# Altium PCB ICwT.PcbDoc (part 2 of 4)
Units mm, origin at the board's own origin, x right, y up, seen from the top; angles counter-clockwise.
Board outline 132 x 99.5 mm, 2 copper layers (Top Layer, Bottom Layer); 241 components, 265 nets, 1108 pads, 443 vias.
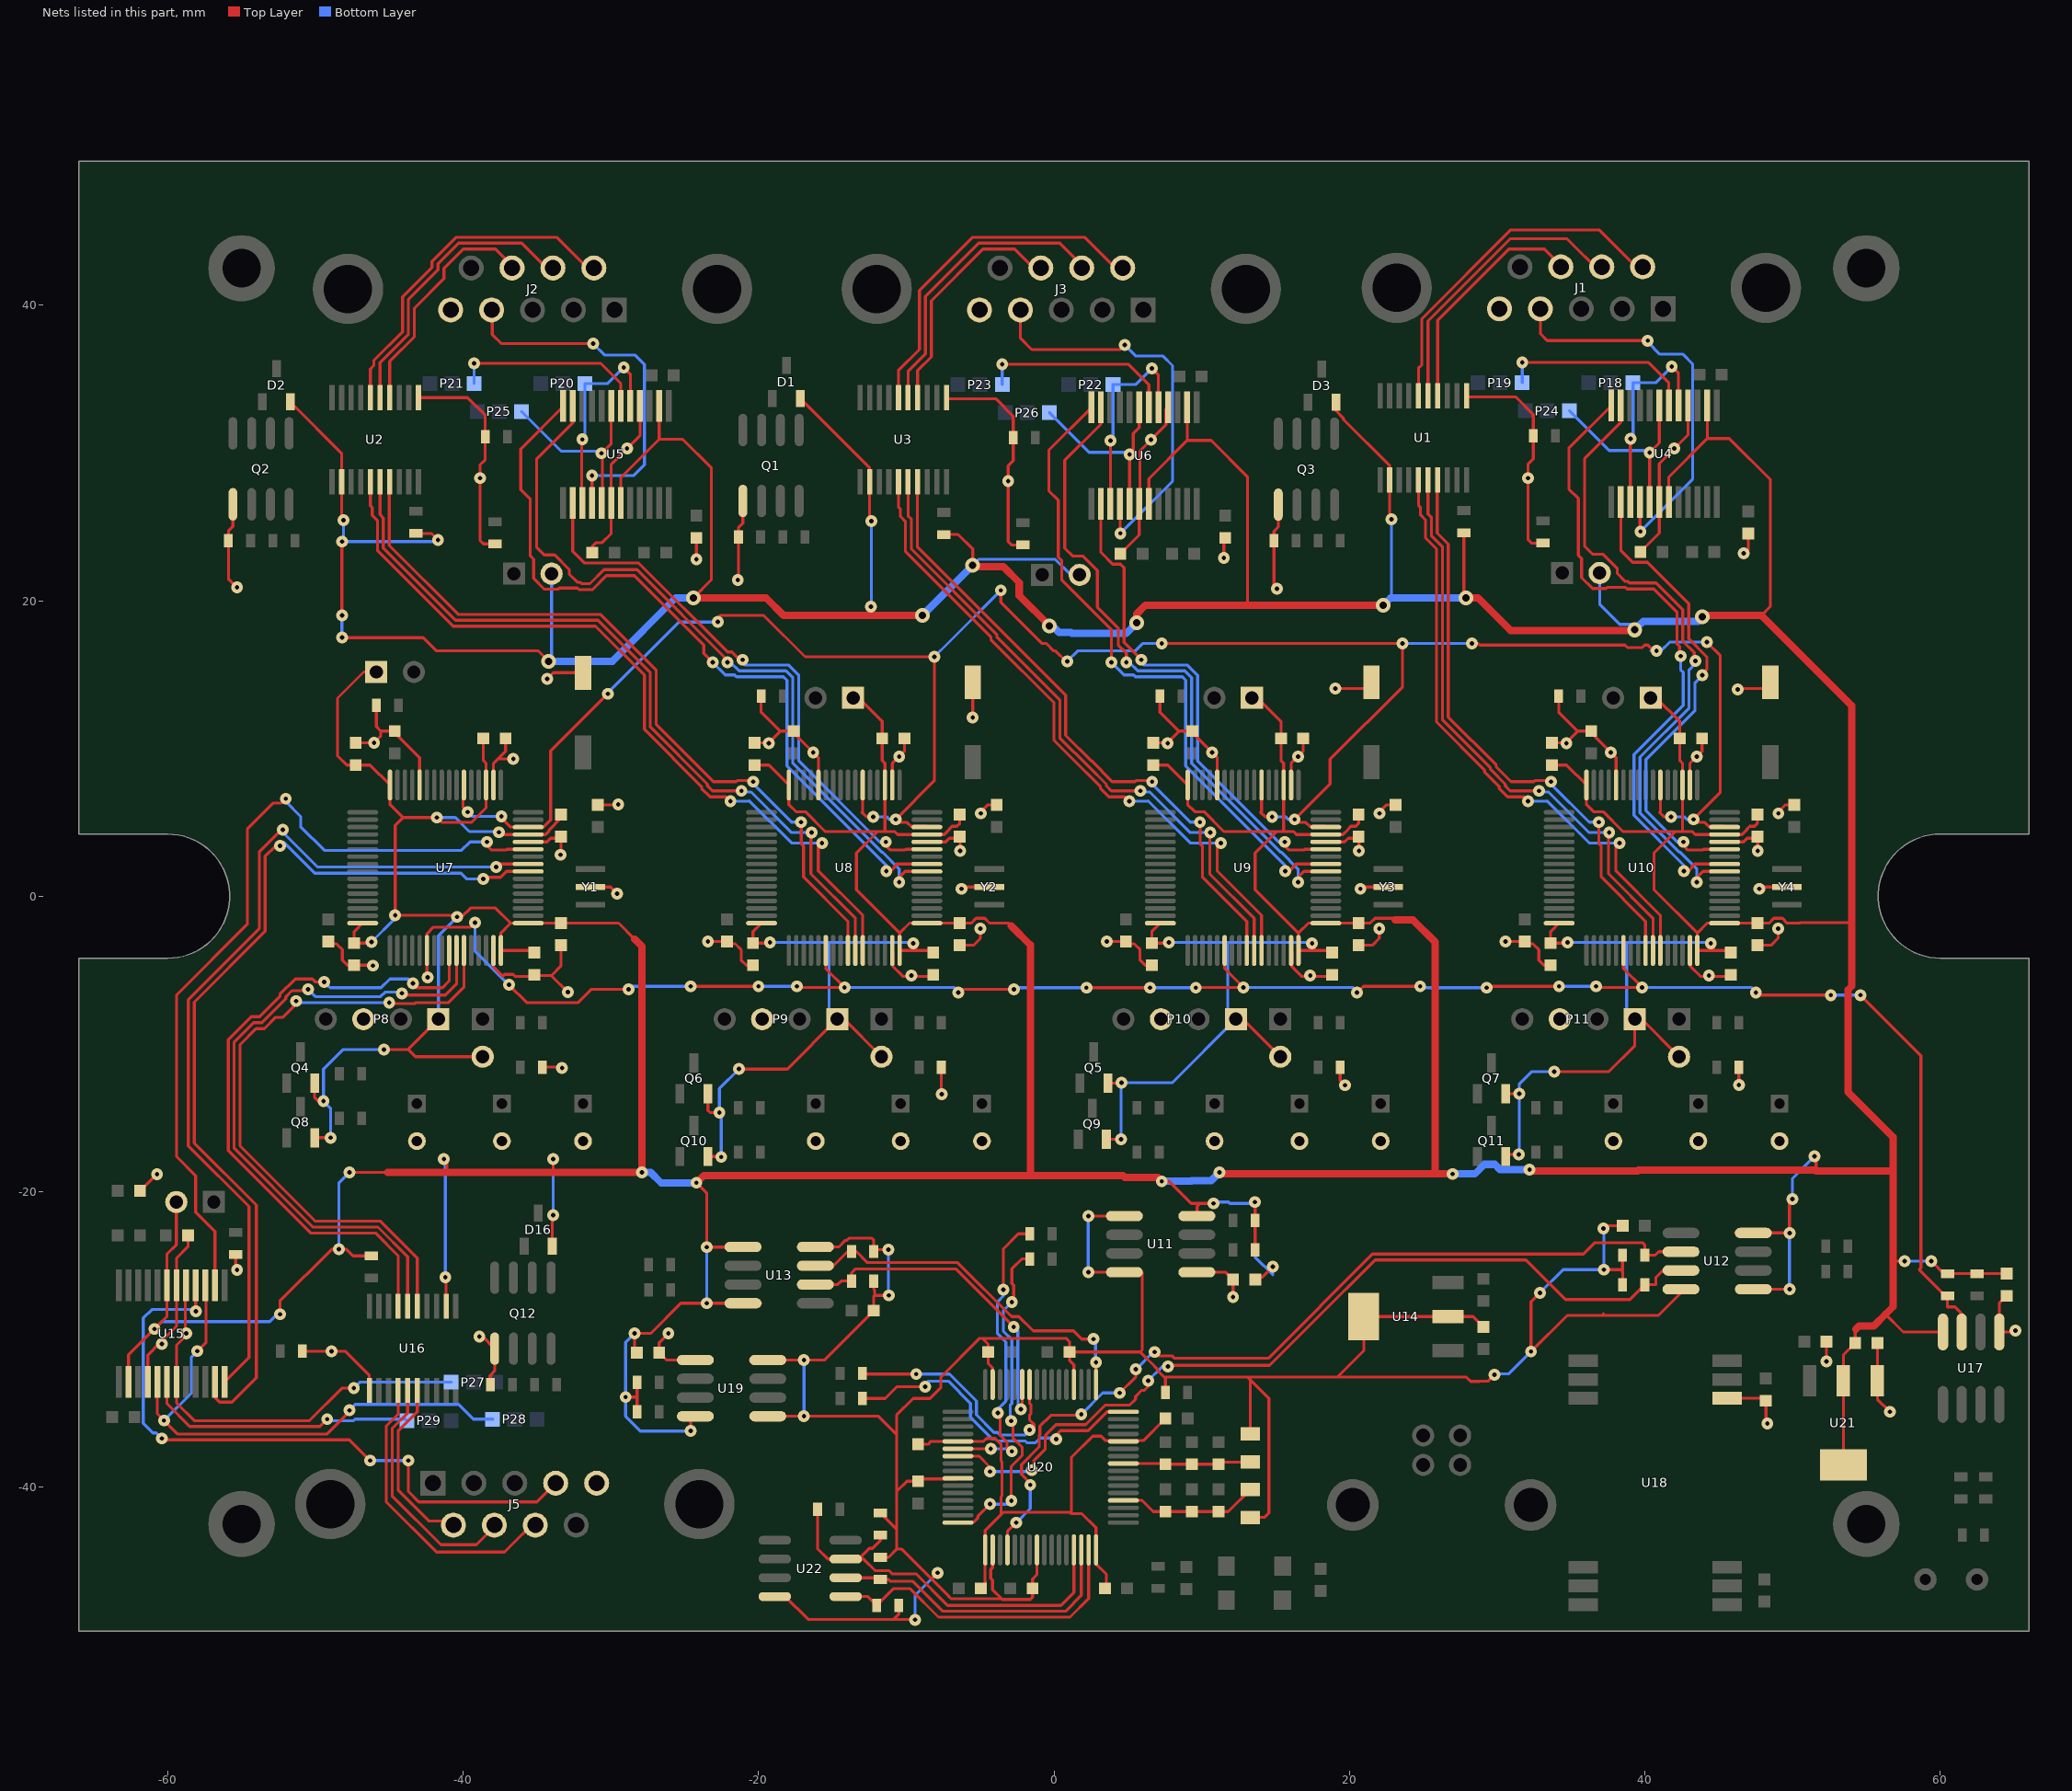
[diagram p2: the nets of this part, all layers, seen from the top]

## Via types
v1: diameter 0.8, hole 0.3, Top Layer to Bottom Layer, 433 vias
v2: diameter 1, hole 0.5, Top Layer to Bottom Layer, 10 vias

## Nets (pads, with @x,y where several pads share a name; then routed paths per layer and width w, separated by ;. In a path a pad name is that pad's centre, name@x,y a point inside that pad or via, vN(x,y) a via of type N, cw(c..) or ccw(c..) an arc to the next point about the centre after c; other vN are vias at no path point)
3.3VDC_External_iface1: C17.2 C18.2 C19.2 C20.2 C21.2 C22.2 C23.2 C24.2 C29.2 C30.2 C31.2 C32.2 C37.2 C38.2 C39.2 C40.2 C41.2 C42.2 C43.2 C44.2 C45.2 C46.2 C47.2 C48.2 C53.2 C54.2 C59.2 C62.2 D1.2 D2.2 D3.2 D16.2 P1.2 P2.2 P3.2 P4.1 P5.1 P6.1 P7.1 P8.1 P9.1 P10.1 P11.1 P12.2 P13.2 P14.2 P15.2 P16.2 Q4.2 Q5.2 Q6.2 Q7.2 Q8.2 Q9.2 Q10.2 Q11.2 R4.2 R5.2 R6.2 R36.2 R40.2 R43.2 R47.2 R48.2 R54.2 R59.2 U1.2 U2.2 U3.2 U4.2 U4.19 U5.2 U5.19 U6.2 U6.19 U7.1 U7.13 U7.19 U7.32 U7.48 U7.64 U8.1 U8.13 U8.19 U8.32 U8.48 U8.64 U9.1 U9.13 U9.19 U9.32 U9.48 U9.64 U10.1 U10.13 U10.19 U10.32 U10.48 U10.64 U11.8 U12.1 U12.4 U13.1 U13.4 U15.2 U15.19 U16.2 U17.8 U19.8 U21.2 U21.4 | length 977.7
  Top Layer w0.2: U15.2@-62.65,-32.875 -62.65,-31.05 v1(-60.9,-29.3) -60.05,-28.45 U15.19@-60.05,-26.325 -60.05,-24.225 -59.415,-23.59 P16.2@-59.415,-20.7 ; v1(-52.4,-28.3) -52.4,-27.4 -48.9,-23.9 -47.9,-23.9 -47.45,-24.35 R43.2@-46.2,-24.35 ; D2.2@-51.685,33.45 -48.225,29.99 U2.2@-48.225,28.05 -48.225,25.578 v1(-48.1,25.453) ; Q8.2@-50.05,-16.35 v1(-48.975,-16.35) ; Q4.2@-50.05,-12.65 -50.05,-13.625 -49.8,-13.875 v1(-49.45,-13.875) ; v1(-48.2,17.5) -42.7,17.5 -41.8,16.6 -34.9,16.6 v2(-34.2,15.9) ; v1(-48.2,19) v1(-48.2,24) ; v1(-47.7,-18.7) -45.1,-18.7 ; U7.48@-46.795,-1.825 -47.375,-2.405 C41.2@-47.375,-3.175 -46.275,-3.175 v1(-46.2,-3.1) ; P4.1@-45.875,15.175 -46.725,15.175 -48.5,13.4 -48.5,9.5 -47.875,8.875 C21.2@-47.275,8.875 -46.295,8.875 U7.32@-44.945,7.525 -44.945,6.195 -44.075,5.325 ; v1(-45.35,-10.375) -43.725,-10.375 ; R5.2@-43.2,24.55 -42.15,24.55 v1(-41.7,24.1) ; P8.1@-41.675,-8.325 -43.725,-10.375 ; v1(-41.3,-17.8) -41.1,-18 -41.1,-18.7 ; v1(-41.2,-25.8) -41.15,-25.85 U16.2@-41.15,-27.75 ; P12.2@-38.675,-10.865 -43.235,-10.865 -43.725,-10.375 ; C17.2@-38.625,10.675 -38.625,9.175 -38.445,8.995 U7.19@-38.445,7.525 -38.445,5.965 -39.41,5 -41.45,5 v1(-41.775,5.325) -44.075,5.325 ; v1(-37.575,4.325) -37.625,4.275 -37.625,4.175 -34.425,4.175 -34.175,4.425 -34.175,4.493 -33.375,5.293 C30.2@-33.375,5.525 ; -36.777,-1.823 -37.8,-0.8 -39.5,-0.8 -40.1,-1.4 v1(-40.4,-1.4) -40.3,-1.3 v1(-44.6,-1.3) -44.6,4.8 -44.075,5.325 ; C46.2@-35.175,-3.825 -35.325,-3.675 U7.64@-37.445,-3.675 -37.445,-2.493 -36.777,-1.825 U7.1@-35.595,-1.825 -29.475,-1.825 -28.4,-2.9 ; D16.2@-33.96,-23.7 -33.96,-21.66 v1(-33.9,-21.6) ; -33.9,-18.7 v1(-33.9,-17.8) ; U5.19@-29.325,26.625 -29.325,28.327 -26.725,30.927 ; v1(-29,-33.9) -28.225,-33.9 ; R59.2@-28.225,-34.9 -28.225,-33.9 ; R54.2@-28.225,-32.9 -28.225,-33.9 ; C62.2@-28.225,-30.9 -28.4,-30.725 v1(-28.4,-29.6) -27.3,-29.6 -25.25,-27.55 v1(-23.5,-27.55) -23.495,-27.555 U13.4@-19.846,-27.555 ; U5.2@-26.725,33.175 -26.725,30.927 ; v1(-24.6,-36.2) -24.6,-35.53 U19.8@-24.275,-35.205 ; v2(-24.4,20.2) -23.2,21.4 -23.2,29 -25.127,30.927 -26.725,30.927 ; v1(-24.2,-19.4) -23.5,-20.1 v1(-23.5,-23.75) -21.055,-23.75 U13.1@-21.05,-23.745 ; Q10.2@-23.425,-17.625 -22.55,-17.625 v1(-22.525,-17.65) ; Q6.2@-23.425,-13.375 -23.425,-14.5 -23.275,-14.65 v1(-22.65,-14.65) ; v1(-21.325,-11.7) -18.05,-11.7 P9.1@-14.675,-8.325 -14.215,-8.325 P13.2@-11.675,-10.865 ; C22.2@-20.275,8.875 -19.295,8.875 U8.32@-17.945,7.525 -17.945,6.195 -17.464,5.714 -16.824,5.714 -15.485,4.375 -11.925,4.375 ; U8.48@-19.795,-1.825 -20.375,-2.405 C42.2@-20.375,-3.175 -19.275,-3.175 v1(-19.225,-3.125) ; D1.2@-17.16,33.675 -12.475,28.99 U3.2@-12.475,28.05 -12.475,25.503 v1(-12.35,25.378) ; P5.1@-13.6,13.425 -13.225,13.425 -11.625,11.825 C18.2@-11.625,10.675 -11.625,9.175 -11.445,8.995 U8.19@-11.445,7.525 -11.445,4.47 -11.35,4.375 ; -12.4,19 v1(-12.4,19.6) ; v1(-9.525,-3.2) -9.375,-3.35 -9.375,-3.675 ; C47.2@-8.175,-3.825 -8.325,-3.675 -9.375,-3.675 ; R6.2@-7.45,24.475 -6.475,24.475 -5.5,23.5 v2(-5.5,22.4) ; C31.2@-6.375,5.525 -6.375,4.925 -6.575,4.725 -6.899,4.725 -7.075,4.549 -7.075,4.525 -7.425,4.175 U8.13@-8.595,4.175 -10.575,4.175 -10.775,4.375 -11.35,4.375 ; -2.9,-2 -3.075,-1.825 -4.36,-1.825 -4.685,-1.5 -5.265,-1.5 -5.59,-1.825 U8.1@-8.595,-1.825 -9.777,-1.825 -10.445,-2.493 ; Q9.2@3.55,-16.45 v1(4.55,-16.45) ; Q5.2@3.65,-12.65 4.55,-12.65 v1(4.575,-12.625) ; U6.19@6.425,26.55 6.425,28.252 9.025,30.852 ; C23.2@6.725,8.875 7.705,8.875 U9.32@9.055,7.525 9.055,6.195 9.536,5.714 10.176,5.714 11.515,4.375 15.075,4.375 ; U9.48@7.205,-1.825 6.625,-2.405 C43.2@6.625,-3.175 7.725,-3.175 v1(7.775,-3.125) ; v1(7.3,-19.3) 7.8,-19.3 9.3,-20.8 9.9,-20.8 ; U6.2@9.025,33.1 9.025,30.852 ; U11.8@9.675,-21.645 9.7,-21.62 9.7,-21 9.9,-20.8 ; v1(10.8,-20.8) 9.9,-20.8 ; P10.1@12.325,-8.325 12.785,-8.325 P14.2@15.325,-10.865 ; 13.1,19.7 13.1,28.4 10.648,30.852 9.025,30.852 ; P6.1@13.4,13.425 13.775,13.425 15.375,11.825 15.375,9.175 15.555,8.995 U9.19@15.555,7.525 15.555,4.47 15.65,4.375 ; v1@13.6,-20.8 13.625,-20.825 R36.2@13.625,-21.95 R40.2@13.625,-23.95 ; C54.2@13.625,-25.95 13.8,-25.775 14.125,-25.775 v1(14.825,-25.075) ; v1(17.475,-3.2) 17.625,-3.35 17.625,-3.675 ; C45.2@18.825,-3.825 18.675,-3.675 17.625,-3.675 ; D3.2@19.09,33.425 19.09,32.858 19.6,32.349 19.6,32.264 22.729,29.135 22.729,25.628 v1(22.854,25.503) ; C29.2@20.625,5.525 20.625,4.925 20.425,4.725 20.101,4.725 19.925,4.549 19.925,4.525 19.575,4.175 U9.13@18.405,4.175 16.425,4.175 16.225,4.375 15.65,4.375 ; 23.1,-1.6 23,-1.5 21.735,-1.5 21.41,-1.825 U9.1@18.405,-1.825 17.223,-1.825 16.555,-2.493 ; v2@27.754,20.346 R4.2@27.754,24.6 ; Q11.2@30.575,-17.625 30.725,-17.475 v1(31.475,-17.475) ; Q7.2@30.575,-13.375 v1(31.5,-13.375) ; C24.2@33.725,8.875 34.705,8.875 U10.32@36.055,7.525 36.055,6.195 36.536,5.714 37.176,5.714 38.515,4.375 42.075,4.375 ; v1(33.875,-11.875) 37.575,-11.875 39.325,-10.125 P11.1@39.325,-8.325 39.785,-8.325 P15.2@42.325,-10.865 ; U10.48@34.205,-1.825 33.625,-2.405 C44.2@33.625,-3.175 34.725,-3.175 v1(34.775,-3.125) ; P7.1@40.4,13.425 40.775,13.425 42.375,11.825 42.375,9.175 42.555,8.995 U10.19@42.555,7.525 42.555,4.47 42.65,4.375 ; U4.19@41.629,26.675 41.629,28.377 44.229,30.977 ; U4.2@44.229,33.225 44.229,30.977 ; v1(44.475,-3.2) 44.625,-3.35 44.625,-3.675 ; C48.2@45.825,-3.825 45.675,-3.675 44.625,-3.675 ; U12.4@46.146,-22.795 49.795,-22.795 v1(49.8,-22.8) 49.8,-20.7 v1(50,-20.5) ; U12.1@47.35,-26.605 47.355,-26.6 v1(49.8,-26.6) ; C40.2@47.625,-2.075 47.375,-1.825 U10.1@45.405,-1.825 44.223,-1.825 43.555,-2.493 ; C40.2@47.625,-1.825 48.41,-1.825 48.735,-1.5 49.315,-1.5 49.64,-1.825 50.475,-1.825 50.5,-1.8 54,-1.8 ; C32.2@47.625,5.525 47.625,4.925 47.425,4.725 47.101,4.725 46.925,4.549 46.925,4.525 46.575,4.175 U10.13@45.405,4.175 43.425,4.175 43.225,4.375 42.65,4.375 ; 47.9,19 48.5,19.6 48.5,28.2 45.723,30.977 44.229,30.977 ; v1(51.5,-17.6) 51.6,-17.7 51.6,-18.6 ; U21.4@53.45,-38.5 U21.2@53.45,-32.8 53.45,-31.05 C59.2@54.25,-30.25 54.25,-29.35 54.3,-29.3 ; 56.3,-28.3 57.5,-29.5 U17.8@60.19,-29.5 ; 56.8,-24.7 v1(57.6,-24.7) ; v1(59.4,-24.7) 60.25,-25.55 R47.2@60.495,-25.55 C53.2@64.495,-25.55 ; -11.925,4.375 -13.375,2.925 -13.375,0.437 -10.445,-2.493 ; -11.925,4.375 -11.35,4.375 ; -10.445,-2.493 U8.64@-10.445,-3.675 -9.375,-3.675 ; 15.075,4.375 13.625,2.925 13.625,0.437 16.555,-2.493 ; 15.075,4.375 15.65,4.375 ; 16.555,-2.493 U9.64@16.555,-3.675 17.625,-3.675 ; 42.075,4.375 40.625,2.925 40.625,0.437 43.555,-2.493 ; 42.075,4.375 42.65,4.375 ; 43.555,-2.493 U10.64@43.555,-3.675 44.625,-3.675
  Top Layer w0.5: -45.1,-18.7 -41.1,-18.7 -33.9,-18.7 v1(-27.9,-18.7) -27.9,-3.4 -28.4,-2.9 ; v2(-24.4,20.2) -19.5,20.2 -18.3,19 -12.4,19 v2(-8.9,19) ; v1(-24.2,-19.4) -23.7,-18.9 -1.6,-18.9 ; v2(-5.5,22.4) -5.4,22.3 -3.422,22.3 -2.35,21.228 -2.35,20.35 v2(-0.3,18.3) ; -2.9,-2 -1.6,-3.3 -1.6,-18.9 ; v2(5.6,18.5) 5.6,19.1 6.2,19.7 13.1,19.7 v2(22.3,19.7) ; v1(7.3,-19.3) 7.025,-19.025 4.807,-19.025 4.682,-18.9 -1.6,-18.9 ; v1(11.2,-18.7) 11.2,-18.8 25.8,-18.8 ; 23.1,-1.6 24.3,-1.6 25.8,-3.1 25.8,-18.8 ; v1(27,-18.8) 25.8,-18.8 ; v2(27.9,20.2) 28.7,20.2 30.925,17.975 39.275,17.975 v2(39.325,18.025) ; v1(32.2,-18.5) 32.3,-18.6 39.521,-18.6 39.571,-18.55 51.55,-18.55 51.6,-18.6 56.8,-18.6 ; v2(43.9,18.9) 44,19 47.9,19 54,12.9 54,-1.8 54,-6.098 53.75,-6.348 53.75,-13.25 56.8,-16.3 56.8,-18.6 ; 54.3,-29.3 54.5,-29.1 55.5,-29.1 56.3,-28.3 56.8,-27.8 56.8,-24.7 56.8,-18.6
  Bottom Layer w0.2: v1(-60.9,-29.3) -60.4,-28.8 -53.1,-28.8 -52.6,-28.3 v1(-52.4,-28.3) ; v1(-48.975,-16.35) -48.975,-14.35 v1(-49.45,-13.875) -49.45,-11.7 -48.125,-10.375 v1(-45.35,-10.375) ; v1(-48.4,-23.9) -48.4,-19.4 v1(-47.7,-18.7) ; v1(-48.2,17.5) v1(-48.2,19) ; v1(-48.1,25.453) -48.1,24.1 v1(-48.2,24) -41.8,24 v1(-41.7,24.1) ; v1(-46.2,-3.1) -44.6,-1.5 v1(-44.6,-1.3) ; P8.1@-41.675,-8.325 -41.675,-2.675 v1(-40.4,-1.4) v1@-40.2,-1.4 ; v1@-41.575,5.525 v1(-41.775,5.325) -40.525,5.325 -39.575,4.375 -37.625,4.375 v1(-37.575,4.325) ; v1(-41.3,-17.8) -41.2,-17.9 v1(-41.2,-25.8) ; v2(-34.2,15.9) -34.01,16.09 P2.2@-34.01,21.825 ; v1(-33.9,-21.6) v1(-33.9,-17.8) ; v1(-28.4,-29.6) -29,-30.2 v1(-29,-33.9) -29,-35.2 -28,-36.2 v1(-24.6,-36.2) ; v1(-23.5,-27.55) v1(-23.5,-23.75) ; v1(-22.525,-17.65) -22.525,-14.775 v1(-22.65,-14.65) -22.65,-13.025 v1(-21.325,-11.7) ; v1(-19.225,-3.125) -15.225,-3.125 ; P9.1@-14.675,-8.325 -15.225,-7.775 -15.225,-3.125 ; v1(-12.4,19.6) -12.35,19.65 v1(-12.35,25.378) ; v1(-9.525,-3.2) -9.6,-3.125 -15.225,-3.125 ; v2(-5.5,22.4) -5.1,22.8 0.074,22.8 1.124,21.75 P3.2@1.74,21.75 ; v1(4.55,-16.45) 4.55,-12.65 v1(4.575,-12.625) 8.025,-12.625 P10.1@12.325,-8.325 11.775,-7.775 11.775,-3.125 ; v1(7.775,-3.125) 11.775,-3.125 ; v1(10.8,-20.8) 10.9,-20.7 11.81,-20.7 11.91,-20.8 13.5,-20.8 v1(13.6,-20.7) 13.6,-24.4 14.825,-25.625 v1(14.825,-25.075) ; v1(17.475,-3.2) 17.4,-3.125 11.775,-3.125 ; 22.8,20.2 22.854,20.254 v1(22.854,25.503) ; v1(31.475,-17.475) 31.5,-17.45 v1(31.5,-13.375) 31.5,-12.725 32.35,-11.875 v1(33.875,-11.875) ; v1(34.775,-3.125) 38.775,-3.125 ; P1.2@36.944,21.875 36.944,19.756 38.3,18.4 39.7,18.4 ; P11.1@39.325,-8.325 38.775,-7.775 38.775,-3.125 ; v1(44.475,-3.2) 44.4,-3.125 38.775,-3.125 ; v1(49.8,-26.6) v1(49.8,-22.8) ; v1(50,-20.5) 50,-19.1 v1(51.5,-17.6) ; v1(57.6,-24.7) v1(59.4,-24.7)
  Bottom Layer w0.5: v2(-34.2,15.9) -29.9,15.9 -25.6,20.2 v2(-24.4,20.2) ; v1(-27.9,-18.7) -27.3,-18.7 -26.6,-19.4 v1(-24.2,-19.4) ; v2(-8.9,19) v2(-5.5,22.4) ; v2(-0.3,18.3) -0.1,18.3 0.35,17.85 1.152,17.85 1.202,17.8 4.9,17.8 v2(5.6,18.5) ; v1(7.3,-19.3) 9.298,-19.3 9.348,-19.25 10.65,-19.25 v1(11.2,-18.7) ; v2(22.3,19.7) 22.8,20.2 v2(27.9,20.2) ; v1(27,-18.8) 28.498,-18.8 29.148,-18.15 29.852,-18.15 30.202,-18.5 v1(32.2,-18.5) ; 39.7,18.4 39.9,18.6 43.6,18.6 v2(43.9,18.9)
/SHDN_External_iface1: U7.8 U15.11 | length 63.3
  Top Layer w0.2: U15.11@-56.8,-32.875 -56.8,-33.924 -56.474,-34.25 -55.65,-34.25 -54,-32.6 -54,-20.907 -58.2,-16.707 -58.2,-7.179 -53.4,-2.379 -53.4,2.7 -52.7,3.4 v1(-52.4,3.4) v1@-52.3,3.5 ; v1(-38.625,1.175) -38.625,1.275 -37.471,1.275 -37.071,1.675 U7.8@-35.595,1.675
  Bottom Layer w0.2: v1(-52.4,3.4) -52.196,3.604 -52.096,3.604 -50.042,1.55 -40.15,1.55 -39.775,1.175 v1(-38.625,1.175)
/SHDN_External_iface2: U5.11 U8.8 | length 51.5
  Top Layer w0.2: U5.11@-32.575,33.175 -32.575,32.025 -35.025,29.575 -35.025,23.625 -34.5,23.1 -33.8,23.1 -32.81,22.11 -32.81,21.785 -32.275,21.25 -32.09,21.25 -31.99,21.15 -31.41,21.15 -30.46,22.1 -28.229,22.1 -22.101,15.972 v1(-22.101,15.826) ; v1@-10.471,1.275 -10.071,1.675 U8.8@-8.595,1.675
  Bottom Layer w0.2: v1(-22.101,15.826) -21.894,15.826 -21.319,15.25 -18.144,15.25 -17.675,14.781 -17.675,8.985 -11.665,2.975 -11.609,2.975 -10.476,1.841 v1(-10.476,0.95)
/SHDN_External_iface3: U6.11 U9.8 | length 44.2
  Top Layer w0.2: U6.11@3.175,33.1 3.175,31.95 0.725,29.5 0.725,23.55 1.25,23.025 1.95,23.025 2.94,22.035 2.94,19.56 4.35,18.15 4.35,17.009 4.899,16.46 v1(4.899,15.826) ; v1@16.529,1.275 16.929,1.675 U9.8@18.405,1.675
  Bottom Layer w0.2: v1(4.899,15.826) 5.106,15.826 5.681,15.25 8.856,15.25 9.325,14.781 9.325,8.985 15.335,2.975 15.391,2.975 16.524,1.841 v1(16.524,0.95)
/SHDN_External_iface4: U4.11 U10.8 | length 43.2
  Top Layer w0.2: U4.11@38.379,33.225 38.379,32.075 35.929,29.625 35.929,23.675 36.454,23.15 37.154,23.15 38.144,22.16 38.144,21.835 38.679,21.3 38.864,21.3 38.964,21.2 40.775,21.2 42.575,19.4 42.575,17.259 43.349,16.485 43.349,15.926 v1(43.427,15.926) ; v1@43.529,1.275 43.929,1.675 U10.8@45.405,1.675
  Bottom Layer w0.2: v1(43.427,15.926) 43.427,15.743 43,15.316 43,12.741 39.675,9.416 39.675,5.635 42.335,2.975 42.391,2.975 43.524,1.841 v1(43.524,0.95)
A(RX+)_External_iface1: P28.1 U15.5 U15.15 | length 37.1
  Top Layer w0.2: U15.5@-60.7,-32.875 -60.7,-35.04 v1(-60.249,-35.49) -59.34,-36.4 -49.2,-36.4 -47.7,-34.9 v1(-47.7,-34.8) ; v1(-57.989,-30.791) -57.4,-30.203 -57.4,-26.375 U15.15@-57.45,-26.325
  Bottom Layer w0.2: v1(-60.249,-35.49) -58.395,-33.636 -58.395,-31.198 v1(-57.989,-30.791) ; v1(-47.7,-34.8) -47.3,-34.4 -40.3,-34.4 -39.3,-35.4 P28.1@-38,-35.4
A(RX+)_External_iface2: P20.1 U5.5 U5.15 | length 14.1
  Top Layer w0.2: U5.15@-31.925,26.625 -31.975,26.675 -31.975,30.866 v1(-31.925,30.916) ; v1(-29.126,35.79) -28.675,35.34 U5.5@-28.675,33.175
  Bottom Layer w0.2: v1(-31.925,30.916) -31.75,31.091 P20.1@-31.75,34.7 -30.216,34.7 v1(-29.126,35.79)
A(RX+)_External_iface3: P22.1 U6.5 U6.15 | length 14
  Top Layer w0.2: U6.15@3.825,26.55 v1(3.825,30.841) ; v1(6.624,35.715) 7.075,35.265 U6.5@7.075,33.1
  Bottom Layer w0.2: v1(3.825,30.841) 4,31.016 P22.1@4,34.625 5.534,34.625 v1(6.624,35.715)
A(RX+)_External_iface4: P18.1 U4.5 U4.15 | length 14
  Top Layer w0.2: U4.15@39.029,26.675 v1(39.029,30.966) ; v1(41.828,35.84) 42.279,35.39 U4.5@42.279,33.225
  Bottom Layer w0.2: v1(39.029,30.966) 39.204,31.141 P18.1@39.204,34.75 40.738,34.75 v1(41.828,35.84)
B(RX-)_External_iface1: J5.4 U15.16 | length 45.3
  Top Layer w0.2: v1(-60.4,-36.7) -60.3,-36.8 -47.7,-36.8 v1(-46.3,-38.2) ; v1(-58.1,-28.1) U15.16@-58.1,-26.325 ; v1(-43.7,-38.2) -43.7,-40.3 -43,-41 -35,-41 J5.4@-33.28,-39.28
  Bottom Layer w0.2: v1(-60.4,-36.7) -60.771,-36.329 -61.011,-36.329 -61.659,-35.681 -61.659,-28.559 -61.075,-27.975 -58.225,-27.975 v1(-58.1,-28.1) ; v1(-46.3,-38.2) v1(-43.7,-38.2)
B(RX-)_External_iface2: J2.4 U5.16 | length 24.8
  Top Layer w0.2: J2.4@-38.02,39.18 -38.02,38.02 -37.4,37.4 v1(-31.2,37.4) ; U5.16@-31.275,26.625 v1(-31.275,28.475)
  Bottom Layer w0.2: v1(-31.275,28.475) -28.441,28.475 -27.716,29.2 -27.716,35.981 -28.364,36.629 -30.429,36.629 v1(-31.2,37.4)
B(RX-)_External_iface3: J3.4 U6.16 | length 27.6
  Top Layer w0.2: J3.4@-2.27,39.18 -2.27,37.77 -1.5,37 4.5,37 v1(4.8,37.3) ; U6.16@4.475,26.55 4.475,24.58 v1(4.5,24.555)
  Bottom Layer w0.2: v1(4.5,24.555) 8.034,28.089 8.034,35.906 7.386,36.554 5.546,36.554 v1(4.8,37.3)
B(RX-)_External_iface4: J1.4 U4.16 | length 27.3
  Top Layer w0.2: J1.4@32.934,39.305 32.934,38.066 33.4,37.6 v1(40.2,37.6) ; U4.16@39.679,26.675 39.679,24.705 v1(39.704,24.68)
  Bottom Layer w0.2: v1(39.704,24.68) 43.238,28.214 43.238,36.031 42.59,36.679 41.025,36.679 40.2,37.504 v1(40.2,37.6)
CLK_GEN_STM321: U7.14 U7.22 U8.14 U8.22 U9.14 U9.22 U10.14 U10.22 | length 161.1
  Top Layer w0.2: U7.22@-39.945,7.525 -39.995,7.475 -39.995,6.439 -40,6.434 -40,6 v1(-39.7,5.7) ; v1(-37.4,5.4) -37.4,5.3 -36.775,4.675 U7.14@-35.595,4.675 ; U7.14@-34.7,4.7 -34.534,4.7 -34.075,5.159 -34.075,9.825 v1(-30.2,13.7) ; v1(-22.759,18.559) -22.8,18.6 -22.8,18.8 -22.6,19 -19.643,19 -16.843,16.2 v1(-8.1,16.2) -8.1,7.8 v1(-10.7,5.2) -10.489,4.989 -9.945,4.989 -9.681,4.725 -8.645,4.725 U8.14@-8.595,4.675 ; U8.22@-12.945,7.525 -12.945,5.731 -13.001,5.675 -12.7,5.375 v1(-12.225,5.375) ; v1(-3.6,20.7) -3.6,19.903 -0.797,17.1 -0.5,17.1 -0.004,16.604 0.106,16.604 0.81,15.9 v1(0.9,15.9) ; v1(7.3,17.1) v1(23.6,17.1) 23.6,14.166 18.7,9.266 18.7,7.6 v1(16.3,5.2) 16.511,4.989 17.055,4.989 17.319,4.725 18.355,4.725 U9.14@18.405,4.675 ; U9.22@14.055,7.525 14.055,5.731 13.999,5.675 14.3,5.375 v1(14.775,5.375) ; v1(28.3,17.1) 28.734,17.1 28.834,17 38.653,17 38.828,16.825 39.822,16.825 39.997,17 40.2,17 40.6,16.6 v1(40.8,16.6) ; U10.22@41.055,7.525 41.055,5.731 40.999,5.675 41.3,5.375 v1(41.775,5.375) ; v1(44.2,17.2) 45.1,16.3 45.1,7 v1(43.3,5.2) 43.511,4.989 44.055,4.989 44.319,4.725 45.355,4.725 U10.14@45.405,4.675
  Bottom Layer w0.2: v1(-39.7,5.7) -39.4,5.4 v1(-37.4,5.4) ; v1(-30.2,13.7) -30.2,13.751 -25.393,18.559 v1(-22.759,18.559) ; v1(-12.225,5.375) -11.325,5.375 -11.15,5.2 v1(-10.7,5.2) ; v1(-8.1,16.2) -7.1,17.2 v1(-3.6,20.7) ; v1(0.9,15.9) 1.6,16.6 5.5,16.6 6,17.1 v1(7.3,17.1) ; v1(14.775,5.375) 15.675,5.375 15.85,5.2 v1(16.3,5.2) ; v1(23.6,17.1) v1(28.3,17.1) ; v1@40.4,16.6 41.09,16.6 41.69,17.2 43.8,17.2 ; v1(41.775,5.375) 42.675,5.375 42.85,5.2 v1(43.3,5.2)
CS0_EX_External_iface1: J5.6 U16.16 | length 11.9
  Top Layer w0.2: U16.16@-43.1,-33.45 -43.1,-34.9 -44.4,-36.2 -44.4,-40.2 -42.3,-42.3 J5.6@-40.655,-42.3
CS0_EX_External_iface2: J2.6 U2.16 | length 23.7
  Top Layer w0.2: U2.16@-46.275,33.75 -46.275,35.685 -46.05,35.91 -46.05,36.25 -44.1,38.2 -44.1,40.566 -42.1,42.566 -42.1,42.966 -40.466,44.6 -33.675,44.6 J2.6@-31.095,42.02
CS0_EX_External_iface3: J3.6 U3.16 | length 24.2
  Top Layer w0.2: U3.16@-10.525,33.75 -10.525,35.575 -9.1,37 -9.1,41 -5.5,44.6 2.075,44.6 J3.6@4.655,42.02
CS0_EX_External_iface4: J1.6 U1.16 | length 24
  Top Layer w0.2: U1.16@24.679,33.875 24.679,35.735 24.904,35.96 24.904,39.07 30.934,45.1 36.904,45.1 J1.6@39.859,42.145
CS0_External_iface1: U7.59 U16.5 | length 44.9
  Top Layer w0.2: v1(-51.3,-7.1) -51.2,-7.2 -52.2,-8.2 -52.69,-8.2 -53.452,-8.962 -54.018,-8.962 -55.1,-10.044 -55.1,-16.897 -49.997,-22 -45.597,-22 -43.1,-24.497 U16.5@-43.1,-27.75 ; v1(-45,-7.2) -45.033,-7.234 v1(-45,-7.2) -44.925,-7.275 -43.275,-7.275 -43.2,-7.2 -40.986,-7.2 -39.945,-6.159 U7.59@-39.945,-3.675
  Bottom Layer w0.2: v1(-51.3,-7.1) -51.2,-7.2 v1(-45,-7.2)
CS0_External_iface2: U2.5 U8.59 | length 54.1
  Top Layer w0.2: U2.5@-46.275,28.05 -46.275,26.418 -46.15,26.293 -46.15,25.775 -45.8,25.425 -45.8,23.403 -40.672,18.275 -31.038,18.275 -27.725,14.962 -27.725,11.289 -23.851,7.415 -23.851,7.295 -23.282,6.725 -22.201,6.725 v1(-21.901,6.425) v1@-21.901,6.474 ; v1(-15.7,3.6) -15.75,3.6 -15.95,3.4 -15.95,1.714 -12.945,-1.291 U8.59@-12.945,-3.675
  Bottom Layer w0.2: v1(-21.901,6.425) -20.65,6.425 -20.62,6.455 -17.764,3.6 v1(-15.7,3.6)
CS0_External_iface3: U3.5 U9.59 | length 44.8
  Top Layer w0.2: U3.5@-10.525,27.975 -10.525,26.343 -10.4,26.218 -10.4,25.7 -10.05,25.35 -10.05,23.328 -4.269,17.547 -4.269,17.382 0,13.113 0,10.547 2.149,8.398 2.207,8.34 2.224,8.34 3.149,7.415 3.149,7.295 3.718,6.725 4.799,6.725 v1(5.099,6.425) v1@5.099,6.474 ; v1(11.3,3.6) 11.25,3.6 11.05,3.4 11.05,1.714 14.055,-1.291 U9.59@14.055,-3.675
  Bottom Layer w0.2: v1(5.099,6.425) 6.35,6.425 6.38,6.455 9.236,3.6 v1(11.3,3.6)
CS0_External_iface4: U1.5 U10.59 | length 41.5
  Top Layer w0.2: U1.5@24.679,28.1 24.679,26.468 24.804,26.343 24.804,25.825 25.154,25.475 25.154,24.244 25.9,23.498 25.9,11.787 29.125,8.562 29.125,8.538 29.149,8.514 29.149,8.415 30.149,7.415 30.149,7.295 30.718,6.725 31.799,6.725 v1(32.099,6.425) v1@32.099,6.474 ; v1(38.3,3.6) 38.25,3.6 38.05,3.4 38.05,1.714 41.055,-1.291 U10.59@41.055,-3.675
  Bottom Layer w0.2: v1(32.099,6.425) 33.35,6.425 33.38,6.455 36.236,3.6 v1(38.3,3.6)
CS1_EX_External_iface1: J5.7 U16.15 | length 17.1
  Top Layer w0.2: U16.15@-43.75,-33.45 -43.75,-34.984 -44.8,-36.034 -44.8,-40.6 -41.5,-43.9 -39.1,-43.9 J5.7@-37.377,-42.178
CS1_EX_External_iface2: J2.7 U2.15 | length 20
  Top Layer w0.2: U2.15@-45.625,33.75 -45.625,36.109 -43.7,38.034 -43.7,40.4 -41.7,42.4 -41.7,42.8 -40.3,44.2 -36.045,44.2 J2.7@-33.865,42.02
CS1_EX_External_iface3: J3.7 U3.15 | length 20.7
  Top Layer w0.2: U3.15@-9.875,33.75 -9.875,35.525 -8.7,36.7 -8.7,40.6 -5.1,44.2 0.4,44.2 1.885,42.715 J3.7@1.885,42.02
CS1_EX_External_iface4: J1.7 U1.15 | length 20.1
  Top Layer w0.2: U1.15@25.329,33.875 25.329,38.929 30.9,44.5 34.734,44.5 J1.7@37.089,42.145
CS1_External_iface1: U7.58 U16.6 | length 44.9
  Top Layer w0.2: v1(-50.5,-6.3) -50.6,-6.4 -51.59,-6.4 -52,-6.81 -52,-6.944 -53.618,-8.562 -54.183,-8.562 -55.5,-9.879 -55.5,-17.063 -50.163,-22.4 -45.763,-22.4 -43.75,-24.413 U16.6@-43.75,-27.75 ; v1@-44.107,-6.607 -44.014,-6.7 -41.193,-6.7 -40.445,-5.952 U7.58@-40.445,-3.675
  Bottom Layer w0.2: v1(-50.5,-6.3) -50,-6.8 -45.59,-6.8 -45.29,-6.5 -44.214,-6.5 v1(-44.139,-6.575)
CS1_External_iface2: U2.6 U8.58 | length 53.2
  Top Layer w0.2: U2.6@-45.625,28.05 -45.625,25.825 -45.4,25.6 -45.4,23.569 -40.506,18.675 -30.872,18.675 -27.325,15.128 -27.325,11.455 -23.451,7.581 -23.451,7.461 -23.116,7.125 v1(-21.151,7.125) v1@-21.051,7.225 ; v1(-16.407,4.307) -16.45,4.264 -16.45,1.507 -13.445,-1.498 U8.58@-13.445,-3.675
  Bottom Layer w0.2: v1(-21.151,7.125) -21.076,7.05 -20.507,7.05 -17.764,4.307 v1(-16.407,4.307)
CS1_External_iface3: U3.6 U9.58 | length 43.8
  Top Layer w0.2: U3.6@-9.875,27.975 -9.875,25.75 -9.65,25.525 -9.65,23.494 -3.869,17.713 -3.869,17.548 0.4,13.279 0.4,10.713 2.373,8.74 2.39,8.74 3.549,7.581 3.549,7.461 3.884,7.125 v1(5.849,7.125) v1@5.949,7.225 ; v1(10.593,4.307) 10.55,4.264 10.55,1.507 13.555,-1.498 U9.58@13.555,-3.675
  Bottom Layer w0.2: v1(5.849,7.125) 5.924,7.05 6.493,7.05 9.236,4.307 v1(10.593,4.307)
CS1_External_iface4: U1.6 U10.58 | length 40.5
  Top Layer w0.2: U1.6@25.329,28.1 25.329,25.875 25.554,25.65 25.554,24.41 26.3,23.664 26.3,11.953 29.525,8.728 29.525,8.704 29.549,8.68 29.549,8.581 30.549,7.581 30.549,7.461 30.884,7.125 v1(32.849,7.125) v1@32.949,7.225 ; v1(37.593,4.307) 37.55,4.264 37.55,1.507 40.555,-1.498 U10.58@40.555,-3.675
  Bottom Layer w0.2: v1(32.849,7.125) 32.924,7.05 33.493,7.05 36.236,4.307 v1(37.593,4.307)
CS2_EX_External_iface1: J5.8 U16.14 | length 20.7
  Top Layer w0.2: U16.14@-44.4,-33.45 -44.4,-35.069 -45.2,-35.869 -45.2,-41 -41.8,-44.4 -37.2,-44.4 J5.8@-34.792,-41.992
CS2_EX_External_iface2: J2.8 U2.14 | length 16.6
  Top Layer w0.2: U2.14@-44.975,33.75 -44.975,36.194 -43.3,37.869 -43.3,39.8 -41.3,41.8 -41.3,42.5 -40,43.8 -37.8,43.8 -36.635,42.635 J2.8@-36.635,42.02
CS2_EX_External_iface3: J3.8 U3.14 | length 16.5
  Top Layer w0.2: U3.14@-9.225,33.75 -9.225,35.575 -8.3,36.5 -8.3,40.3 -4.8,43.8 -2.665,43.8 J3.8@-0.885,42.02
CS2_EX_External_iface4: J1.8 U1.14 | length 16.4
  Top Layer w0.2: U1.14@25.979,33.875 25.979,38.979 30.8,43.8 33.2,43.8 34.126,42.874 34.126,42.338 J1.8@34.319,42.145
CS2_External_iface1: U7.57 U16.7 | length 45.5
  Top Layer w0.2: v1@-49.1,-5.8 -50.01,-5.8 -50.21,-5.6 -51.356,-5.6 -52.4,-6.644 -52.4,-6.779 -53.783,-8.162 -54.349,-8.162 -55.9,-9.713 -55.9,-17.228 -50.328,-22.8 -45.928,-22.8 -44.4,-24.328 U16.7@-44.4,-27.75 U16.7@-44.425,-27.725 ; v1(-43.4,-5.9) -43.4,-6 -43.2,-6.2 -41.4,-6.2 -40.945,-5.745 U7.57@-40.945,-3.675
  Bottom Layer w0.2: v1(-49.4,-5.8) -49.4,-5.81 -49.11,-6.1 -49.1,-6.1 -49,-6.2 -45.556,-6.2 -44.956,-5.6 -43.7,-5.6 v1(-43.4,-5.9)
CS2_External_iface2: U2.7 U8.57 | length 52.4
  Top Layer w0.2: U2.7@-44.975,28.05 -45,28.025 -45,23.734 -40.341,19.075 -30.706,19.075 -26.925,15.294 -26.925,11.62 -23.055,7.75 -21.516,7.75 -21.441,7.825 -20.426,7.825 v1(-20.351,7.75) v1@-20.5,7.75 ; v1(-17.114,5.014) -17.107,5.007 -17.107,3.557 -16.95,3.4 -16.95,1.3 -13.945,-1.705 U8.57@-13.945,-3.675
  Bottom Layer w0.2: v1(-20.351,7.75) -20.351,7.601 -17.764,5.014 v1(-17.114,5.014)
CS2_External_iface3: U3.7 U9.57 | length 43.1
  Top Layer w0.2: U3.7@-9.225,27.975 -9.25,27.95 -9.25,23.659 0.8,13.609 0.8,10.878 2.539,9.14 2.556,9.14 3.945,7.75 5.484,7.75 5.559,7.825 6.574,7.825 v1(6.649,7.75) v1@6.5,7.75 ; v1(9.886,5.014) 9.893,5.007 9.893,3.557 10.05,3.4 10.05,1.3 13.055,-1.705 U9.57@13.055,-3.675
  Bottom Layer w0.2: v1(6.649,7.75) 6.649,7.601 9.236,5.014 v1(9.886,5.014)
CS2_External_iface4: U1.7 U10.57 | length 39.8
  Top Layer w0.2: U1.7@25.979,28.1 25.954,28.075 25.954,24.575 26.7,23.829 26.7,12.119 29.925,8.894 29.925,8.869 29.949,8.846 29.949,8.747 30.945,7.75 32.484,7.75 32.559,7.825 33.574,7.825 v1(33.649,7.75) v1@33.5,7.75 ; v1(36.886,5.014) 36.893,5.007 36.893,3.557 37.05,3.4 37.05,1.3 40.055,-1.705 U10.57@40.055,-3.675
  Bottom Layer w0.2: v1(33.649,7.75) 33.649,7.601 36.236,5.014 v1(36.886,5.014)
DSUB1_External_iface1: P29.1 U15.6 | length 18.8
  Top Layer w0.2: U15.6@-60.05,-32.875 -60.05,-34.35 -58.5,-35.9 -49.7,-35.9 v1(-49.2,-35.4) v1@-49.15,-35.35
  Bottom Layer w0.2: v1(-49.2,-35.4) -49.1,-35.5 -47.41,-35.5 -47.31,-35.4 -43.9,-35.4 P29.1@-43.8,-35.5
DSUB1_External_iface2: P21.1 U5.6 | length 13.4
  Top Layer w0.2: v1(-39.25,36.07) -30.697,36.07 -29.325,34.698 U5.6@-29.325,33.175
  Bottom Layer w0.2: P21.1@-39.25,34.7 v1(-39.25,36.07)
DSUB1_External_iface3: P23.1 U6.6 | length 13.4
  Top Layer w0.2: v1(-3.5,35.995) 5.053,35.995 6.425,34.623 U6.6@6.425,33.1
  Bottom Layer w0.2: P23.1@-3.5,34.625 v1(-3.5,35.995)
DSUB1_External_iface4: P19.1 U4.6 | length 13.4
  Top Layer w0.2: v1(31.704,36.12) 40.257,36.12 41.629,34.748 U4.6@41.629,33.225
  Bottom Layer w0.2: P19.1@31.704,34.75 v1(31.704,36.12)
DSUB2_External_iface1: P27.1 U15.7 U15.17 | length 28.9
  Top Layer w0.2: U15.17@-58.75,-26.325 -58.8,-26.375 -58.8,-29.55 v1(-58.75,-29.6) -58.75,-29.724 -59.4,-30.374 U15.7@-59.4,-32.875 -59.4,-34.3 -58.2,-35.5 -50.4,-35.5 -48.2,-33.3 v1(-47.4,-33.3)
  Bottom Layer w0.2: v1@-58.75,-29.928 v1@-58.422,-29.6 ; v1(-47.4,-33.3) -47,-32.9 P27.1@-40.8,-32.9
DSUB2_External_iface2: P25.1 U5.7 U5.17 | length 13.8
  Top Layer w0.2: U5.17@-30.625,26.625 -30.575,26.675 -30.575,29.928 v1(-30.625,29.978) -29.975,30.628 U5.7@-29.975,33.175
  Bottom Layer w0.2: P25.1@-36.05,32.8 -33.366,30.116 -30.65,30.116 v1@-30.625,30.091 ; v1(-30.625,29.978) v1@-30.625,30.091 ; v1@-30.375,30.228 v1@-30.625,30.091
DSUB2_External_iface3: P26.1 U6.7 U6.17 | length 13.8
  Top Layer w0.2: U6.17@5.125,26.55 v1(5.125,29.903) 5.375,30.153 5.375,31.316 5.775,31.716 U6.7@5.775,33.1
  Bottom Layer w0.2: P26.1@-0.3,32.725 2.384,30.041 5.1,30.041 v1@5.125,30.016 ; v1(5.125,29.903) v1@5.125,30.016 ; v1@5.375,30.153 v1@5.125,30.016
DSUB2_External_iface4: P24.1 U4.7 U4.17 | length 13.8
  Top Layer w0.2: U4.17@40.329,26.675 v1(40.329,30.028) 40.979,30.678 U4.7@40.979,33.225
  Bottom Layer w0.2: P24.1@34.904,32.85 37.588,30.166 40.304,30.166 v1@40.329,30.141 ; v1(40.329,30.028) v1@40.329,30.141 ; v1@40.579,30.278 v1@40.329,30.141
EECLK: R65.2 U20.62 U22.2 | length 20.4
  Top Layer w0.2: U22.2@-14.1,-46.135 -11.865,-46.135 R65.2@-11.75,-46.25 -11.195,-46.25 -11.07,-46.375 -9.532,-46.375 -7.507,-48.4 0.782,-48.4 1.85,-47.332 U20.62@1.85,-44.25
EECS: R67.2 U20.63 U22.1 | length 21.8
  Top Layer w0.2: U22.1@-14.1,-47.405 -12.595,-47.405 R67.2@-12,-48 -10.875,-46.875 -9.739,-46.875 -7.814,-48.8 1.089,-48.8 2.35,-47.539 U20.63@2.35,-44.25
EEDATA: R62.2 R63.2 U20.61 U22.3 | length 27.2
  Top Layer w0.2: R62.2@-16,-41.5 -16,-44.175 -15.31,-44.865 U22.3@-14.1,-44.865 U22.3@-13.215,-44.865 ; R63.2@-11.75,-43.25 -11.75,-43.625 -12.275,-44.15 -12.5,-44.15 U22.3@-13.215,-44.865 ; U20.61@1.35,-44.25 1.35,-47.125 0.475,-48 -7.2,-48 -9.325,-45.875 -10.951,-45.875 -11.176,-45.65 -12.11,-45.65 -12.895,-44.865 U22.3@-13.215,-44.865
EXT_SYNC: R47.1 U7.54 U8.54 U9.54 U10.54 U17.7 | length 140.6
  Top Layer w0.2: v1(-42.4,-5.5) -42.445,-5.455 U7.54@-42.445,-3.675 -42.445,-2.545 -42,-2.1 -39.5,-2.1 v1(-39.2,-1.8) ; v1(-36.9,-6) -35.7,-7.2 -32.2,-7.2 -31.3,-6.3 v1(-28.8,-6.3) ; v1(-24.6,-6.1) v1(-20,-6.1) ; v1(-17.4,-6.1) -17.325,-6.175 v1(-14.175,-6.175) -15.445,-4.905 U8.54@-15.445,-3.675 ; v1(-6.475,-6.525) -6.25,-6.3 v1(-2.7,-6.3) ; v1(2.2,-6.2) v1(6.5,-6.2) ; v1(9.6,-6.2) 9.625,-6.175 v1(12.825,-6.175) 11.555,-4.905 U9.54@11.555,-3.675 ; v1(20.525,-6.525) 20.95,-6.1 v1(24.8,-6.1) ; v1(29.3,-6.2) 29.4,-6.1 v1(34.2,-6.1) ; v1(36.7,-6.1) 36.775,-6.175 v1(39.825,-6.175) 38.555,-4.905 U10.54@38.555,-3.675 ; v1@47.7,-6.7 v1(52.6,-6.7) ; v1(54.6,-6.7) 58.7,-10.8 58.7,-25.156 58.6,-25.256 58.6,-25.3 60.35,-27.05 R47.1@60.495,-27.05 60.495,-27.8 60.995,-27.8 61.46,-28.265 U17.7@61.46,-29.5
  Bottom Layer w0.2: v1(-39.2,-1.8) -39.2,-3.7 v1(-36.9,-6) ; v1(-28.8,-6.3) -28.6,-6.1 v1(-24.6,-6.1) ; v1(-20,-6.1) v1(-17.4,-6.1) ; v1@-14.225,-6.225 v1(-14.175,-6.175) -6.775,-6.175 -6.475,-6.475 v1(-6.475,-6.525) ; v1(-2.7,-6.3) -2.6,-6.2 v1(2.2,-6.2) ; v1(6.5,-6.2) v1(9.6,-6.2) ; v1@12.775,-6.225 v1(12.825,-6.175) 20.225,-6.175 20.525,-6.475 v1(20.525,-6.525) ; v1(24.8,-6.1) 24.8,-6.2 v1(29.3,-6.2) ; v1(34.2,-6.1) v1(36.7,-6.1) ; v1@39.775,-6.225 v1(39.825,-6.175) 47.225,-6.175 47.525,-6.475 v1(47.525,-6.525) v1@47.7,-6.7 ; v1(52.6,-6.7) v1(54.6,-6.7)
FAST_External_iface1: U7.9 U15.12 | length 60.4
  Top Layer w0.2: U15.12@-56.15,-32.875 -54.5,-31.225 -54.5,-21 -58.6,-16.9 -58.6,-7.013 -53.8,-2.213 -53.8,2.99 -52.29,4.5 v1(-52.2,4.5) ; v1(-37.761,1.975) -37.825,1.975 -37.625,2.175 U7.9@-35.595,2.175
  Bottom Layer w0.2: v1(-52.2,4.5) -52.2,4.309 -49.866,1.975 v1(-37.761,1.975)
FAST_External_iface2: U5.12 U8.9 | length 53.2
  Top Layer w0.2: U5.12@-33.225,33.175 -33.225,33.135 -36.091,30.269 -36.091,27.507 -35.45,26.866 -35.45,23.025 -35.225,22.8 -35.225,21.505 -34.495,20.775 -33.575,20.775 -33.5,20.85 -32.256,20.85 -32.156,20.75 -31.244,20.75 -30.294,21.7 -28.394,21.7 -23.701,17.007 -23.701,16.426 v1(-23.101,15.826) ; v1(-11.35,1.7) -11.036,1.7 -10.761,1.975 -10.825,1.975 -10.625,2.175 U8.9@-8.595,2.175
  Bottom Layer w0.2: v1(-23.101,15.826) -22.25,14.975 -21.609,14.975 -21.484,14.85 -18.309,14.85 -18.075,14.616 -18.075,8.819 -11.35,2.094 v1(-11.35,1.7)
FAST_External_iface3: U6.12 U9.9 | length 44.5
  Top Layer w0.2: U6.12@2.525,33.1 2.525,33.06 -0.341,30.194 -0.341,27.432 0.3,26.791 0.3,22.95 0.525,22.725 0.525,21.409 3.899,18.035 v1(3.899,15.826) ; v1(15.65,1.7) 15.964,1.7 16.239,1.975 16.175,1.975 16.375,2.175 U9.9@18.405,2.175
  Bottom Layer w0.2: v1(3.899,15.826) 4.75,14.975 5.391,14.975 5.516,14.85 8.691,14.85 8.925,14.616 8.925,8.819 15.65,2.094 v1(15.65,1.7)
FAST_External_iface4: U4.12 U10.9 | length 44.3
  Top Layer w0.2: U4.12@37.729,33.225 37.729,33.185 34.863,30.319 34.863,27.557 35.504,26.916 35.504,23.075 35.729,22.85 35.729,21.555 36.459,20.825 37.379,20.825 37.454,20.9 38.698,20.9 38.798,20.8 40.609,20.8 42.175,19.234 42.175,17.094 42.35,16.919 42.35,16.328 v1(42.427,16.251) ; v1(42.65,1.7) 42.964,1.7 43.239,1.975 43.175,1.975 43.375,2.175 U10.9@45.405,2.175
  Bottom Layer w0.2: v1(42.427,16.251) 42.427,15.323 42.6,15.15 42.6,12.906 39.275,9.581 39.275,5.469 42.65,2.094 v1(42.65,1.7)
FT_RXD1: R41.1 U13.7 U20.17 | length 24.8
  Top Layer w0.2: U13.7@-16.15,-25.015 -14.915,-25.015 -13.95,-24.05 R41.1@-13.7,-24.05 -13.374,-24.05 -12.624,-24.8 -6.515,-24.8 -2.865,-28.45 -2.375,-28.45 -1.4,-29.425 1.325,-29.425 1.875,-29.975 v1(2.675,-29.975) ; U20.17@2.85,-33.05 v1(2.85,-31.552)
  Bottom Layer w0.2: v1(2.675,-29.975) 2.823,-30.123 2.823,-31.552 v1(2.85,-31.552)
FT_RXD2: R49.1 U13.6 U20.27 | length 23.3
  Top Layer w0.2: U13.6@-16.15,-26.285 -14.635,-26.285 -14.4,-26.05 R49.1@-13.7,-26.05 -13.7,-25.5 -13.425,-25.225 -6.656,-25.225 -2.731,-29.15 v1(-2.725,-29.15) ; v1(-2.25,-34.727) -2.252,-34.727 -2.15,-34.625 U20.27@-2.15,-33.05
  Bottom Layer w0.2: v1(-2.725,-29.15) -2.45,-29.425 -2.45,-33.769 -2.425,-33.794 -2.425,-34.553 -2.252,-34.727 v1(-2.25,-34.727)
FT_RXD3: R50.1 U12.7 U20.39 | length 58.9
  Top Layer w0.2: U20.39@-6.5,-37.9 -5.075,-37.9 -4.325,-38.65 v1(-4.325,-38.95) ; v1(-1.5,-38.85) -1.35,-38.7 -1.35,-38.198 -0.6,-37.448 -0.6,-36.659 -0.55,-36.609 -0.55,-36.46 0.135,-35.775 2.15,-35.775 3.475,-34.45 5.125,-34.45 5.525,-34.05 5.525,-33.86 5.935,-33.45 6.125,-33.45 6.375,-33.2 v1(6.375,-32.8) ; v1(7.725,-31.825) 7.8,-31.75 14.601,-31.75 19.801,-26.55 19.825,-26.55 21.75,-24.625 31.95,-24.625 34.625,-27.3 39,-27.3 R50.1@40,-26.3 40.75,-26.3 40.75,-25.8 41.215,-25.335 U12.7@42.45,-25.335
  Bottom Layer w0.2: v1(-4.325,-38.95) -1.6,-38.95 v1(-1.5,-38.85) ; v1(6.375,-32.8) 7.35,-31.825 v1(7.725,-31.825)
FT_RXD4: R42.1 U12.6 U20.52 | length 60
  Top Layer w0.2: U20.52@-3.15,-44.25 -3.15,-43 v1(-2.55,-42.4) ; v1(-1.6,-39.852) -1.6,-39.74 -2.2,-39.14 -2.2,-38.482 -1,-37.282 -1,-36.494 -0.95,-36.444 -0.95,-35.875 -0.213,-35.138 1.913,-35.138 v1(1.85,-35.075) ; v1(4.45,-33.625) 5.55,-32.525 v1(5.55,-32.025) ; v1(6.825,-30.85) 7.1,-31.125 8.015,-31.125 8.165,-31.275 14.51,-31.275 21.56,-24.225 35.85,-24.225 36.625,-23.45 39.85,-23.45 40,-23.6 R42.1@40,-24.3 40.7,-24.3 40.935,-24.065 U12.6@42.45,-24.065
  Bottom Layer w0.2: v1(-2.55,-42.4) -1.6,-41.45 v1(-1.6,-39.852) ; v1(1.85,-35.075) 3.3,-33.625 v1(4.45,-33.625) ; v1(5.55,-32.025) 6.725,-30.85 v1(6.825,-30.85)
FT_TXD1: R58.1 U20.16 | length 21.9
  Top Layer w0.2: R58.1@-12.975,-34 -11.425,-34 -10.627,-33.202 v1(-8.725,-33.202) ; v1@-0.2,-36.825 0.45,-36.175 2.316,-36.175 3.591,-34.9 U20.16@4.7,-34.9
  Bottom Layer w0.2: v1(-8.725,-33.202) -8.725,-33.05 -8.5,-32.825 -7.156,-32.825 -5.65,-34.331 -5.65,-35.266 -4.216,-36.7 -3.985,-36.7 -3.81,-36.875 -1.948,-36.875 -1.821,-37.002 -1.252,-37.002 -0.937,-36.687 -0.95,-36.675 0.075,-36.675 v1(0.15,-36.75)
FT_TXD2: R53.1 U20.26 | length 17.7
  Top Layer w0.2: R53.1@-12.975,-32.3 -12.925,-32.35 v1(-9.325,-32.35) ; v1(-1.65,-36.127) -1.625,-36.127 -1.525,-36.227 -1.35,-36.052 -1.35,-35.752 -1.65,-35.452 -1.65,-35.117 -1.55,-35.017 -1.55,-34.437 -1.65,-34.337 U20.26@-1.65,-33.05
  Bottom Layer w0.2: v1(-9.325,-32.35) -7.065,-32.35 -5.25,-34.165 -5.25,-35.1 -4.05,-36.3 -3.819,-36.3 -3.644,-36.475 -1.978,-36.475 v1@-1.728,-36.225 ; v1(-1.65,-36.127) -1.625,-36.127 -1.525,-36.227 v1@-1.35,-36.052
FT_TXD3: R37.1 U20.38 | length 21.1
  Top Layer w0.2: U20.38@-6.5,-37.4 v1(-4.275,-37.4) ; v1(-3.8,-34.977) -3.65,-35.127 -3.65,-36.469 -3.175,-36.944 -3.175,-37.404 -3.002,-37.577 v1(-2.85,-37.577) ; v1(-3.425,-26.626) -3.425,-23.875 -2.4,-22.85 R37.1@-1.625,-22.85
  Bottom Layer w0.2: v1(-4.275,-37.4) -3.027,-37.4 v1(-2.85,-37.577) ; v1(-3.8,-34.977) -3.548,-34.977 -3.725,-34.8 -3.725,-34.646 -3.25,-34.171 -3.25,-30.181 -3.825,-29.606 -3.825,-27.46 -3.425,-27.06 v1(-3.425,-26.626)
FT_TXD4: R44.1 U20.48 | length 22.8
  Top Layer w0.2: U20.48@-6.5,-42.4 -6.45,-42.35 -5.414,-42.35 -5.15,-42.086 -5.15,-41.975 v1(-4.325,-41.15) ; v1(-2.9,-35.525) -2.775,-35.65 -2.775,-36.662 -2.15,-37.287 -2.15,-37.867 -2.9,-38.617 -2.9,-40.9 v1(-2.875,-40.925) ; v1(-2.85,-27.475) -2.725,-27.35 -2.725,-26.335 -2.85,-26.21 -2.85,-25.225 -2.175,-24.55 R44.1@-1.625,-24.55
  Bottom Layer w0.2: v1(-4.325,-41.15) -3.1,-41.15 v1(-2.875,-40.925) ; v1(-2.9,-35.525) -2.95,-35.475 -2.95,-34.437 -2.85,-34.337 -2.85,-30.015 -3.425,-29.44 -3.425,-28.05 v1(-2.85,-27.475)
FT_VCC18: C65.2 C66.2 C77.2 C78.2 U20.12 U20.37 U20.49 U20.64 | length 39.2
  Top Layer w0.2: C66.2@-9.2,-37.1 -8.525,-37.1 -8.325,-36.9 U20.37@-6.5,-36.9 -4.765,-36.9 -4.565,-36.7 -3.985,-36.7 -3.575,-37.11 -3.575,-38.225 -3.525,-38.275 -3.525,-40.585 -3.575,-40.635 -3.575,-41.75 -3.525,-41.8 ; C77.2@-4.95,-46.85 -4.65,-46.55 -4.65,-46.356 -4.675,-46.331 -4.675,-44.275 U20.49@-4.65,-44.25 -4.65,-42.925 -3.525,-41.8 ; C78.2@3.55,-46.85 3.55,-45.9 2.85,-45.2 U20.64@2.85,-44.25 2.85,-42.75 1.9,-41.8 1.175,-41.8 ; C65.2@7.55,-35.35 6.05,-36.85 4.75,-36.85 U20.12@4.7,-36.9 4.652,-36.852 3.508,-36.852 3.204,-36.547 2.624,-36.547 1.175,-37.996 1.175,-41.8 ; -3.525,-41.8 -3.425,-41.7 1.075,-41.7 1.175,-41.8
FT_VCC33: C50.2 C56.2 C57.2 C60.2 C61.2 C70.2 C79.2 L1.1 L2.1 R41.2 R42.2 R49.2 R50.2 R57.2 R63.1 R65.1 R67.1 U11.1 U11.4 U12.8 U13.8 U14.2 U14.4 U19.1 U19.4 U20.20 U20.31 U20.42 U20.50 U20.56 U22.8 | length 211.8
  Top Layer w0.2: U19.4@-20.579,-31.395 U19.4@-19.375,-31.395 -16.93,-31.395 v1(-16.925,-31.4) -15.55,-31.4 C56.2@-12.2,-28.05 -12.2,-27.075 -12.15,-27.025 ; U19.1@-19.375,-35.205 -19.37,-35.2 v1(-16.925,-35.2) -11.875,-35.2 -10.65,-36.425 ; U22.8@-18.9,-47.405 -18.195,-47.405 -16.65,-48.95 -10.85,-48.95 ; U13.8@-16.15,-23.745 -14.569,-23.745 -14.124,-23.3 -14.025,-23.3 -13.875,-23.15 -12.325,-23.15 -12.2,-23.275 R41.2@-12.2,-24.05 -12.075,-23.925 v1(-11.2,-23.925) ; R49.2@-12.2,-26.05 -12.2,-26.575 -12.15,-26.625 -12.15,-27.025 ; R65.1@-11.75,-44.75 -11.2,-44.75 -10.65,-44.2 ; R63.1@-11.75,-41.75 -10.65,-42.85 ; v1(-11.175,-27.025) -12.15,-27.025 ; R67.1@-10.5,-48 -10.5,-48.6 -10.85,-48.95 ; v1(-9.4,-48.975) -9.425,-48.95 -10.85,-48.95 ; v1(-7.875,-45.8) -8.275,-46.2 -8.275,-46.225 ; U20.42@-6.5,-39.4 -6.55,-39.45 -9.05,-39.45 C70.2@-9.2,-39.6 -9.95,-39.6 -10.65,-40.3 ; U20.50@-4.15,-44.25 -4.15,-45.46 -4.275,-45.585 -4.275,-46.165 -4.15,-46.29 -4.15,-46.95 -3.55,-47.55 ; U20.31@-4.15,-33.05 -4.15,-31.925 -4.45,-31.625 C61.2@-4.45,-30.85 -4.45,-30.325 -4.85,-29.925 ; U20.56@-1.15,-44.25 -1.15,-45.925 -1.45,-46.225 C79.2@-1.45,-46.85 -1.45,-47.45 -1.6,-47.6 -3.5,-47.6 -3.55,-47.55 ; U20.20@1.35,-33.05 1.35,-31.725 1.05,-31.425 C60.2@1.05,-30.85 ; v1(2.325,-25.45) 2.33,-25.455 U11.4@4.775,-25.455 5.979,-25.455 5.979,-30.721 5.85,-30.85 ; v1(2.325,-21.65) 4.77,-21.65 U11.1@4.775,-21.645 ; R57.2@7.55,-33.6 7.55,-32.55 ; L2.1@13.3,-42.05 14.25,-42.05 14.55,-41.75 14.55,-34 13.3,-32.75 ; L1.1@13.3,-36.4 13.3,-32.75 ; C57.2@29.075,-29.15 28.375,-28.45 U14.2@26.675,-28.45 U14.4@20.975,-28.45 20.975,-30.775 19.2,-32.55 ; v1(29.825,-32.4) 29.4,-32.825 28.815,-32.825 28.79,-32.85 28.21,-32.85 27.91,-32.55 19.2,-32.55 ; v1(32.9,-26.85) 32.3,-27.45 v1(32.3,-30.825) 34.75,-28.375 37.2,-28.375 ; 37.2,-28.25 37.2,-28.375 ; v1(37.2,-22.5) 37.4,-22.3 C50.2@38.5,-22.3 ; v1(37.225,-25.275) 38.5,-25.275 ; R50.2@38.5,-26.3 38.5,-25.475 38.5,-25.275 ; R42.2@38.5,-24.3 38.5,-25.275 ; U12.8@42.45,-26.605 42.45,-26.85 40.925,-28.375 37.2,-28.375 ; -10.65,-44.2 -10.3,-44.2 -8.275,-46.225 ; -10.65,-44.2 -10.65,-42.85 ; -10.65,-42.85 -10.65,-40.3 ; -10.65,-40.3 -10.65,-36.425 ; -10.65,-36.425 -10.65,-35.125 -9.525,-34 -8.4,-34 -7.65,-33.25 -7.65,-32.55 -5.025,-29.925 -4.85,-29.925 ; -8.275,-46.225 -7.15,-47.35 -7.15,-47.374 -6.974,-47.55 -3.55,-47.55 ; -4.85,-29.925 0.825,-29.925 1.05,-30.15 C60.2@1.05,-30.85 ; C60.2@1.05,-30.85 5.85,-30.85 ; 5.85,-30.85 6.125,-31.125 6.125,-31.14 6.535,-31.55 6.55,-31.55 7.025,-32.025 7.025,-32.115 7.46,-32.55 7.55,-32.55 ; 7.55,-32.55 13.1,-32.55 ; 13.1,-32.55 19.2,-32.55 ; 13.1,-32.55 13.3,-32.75
  Bottom Layer w0.2: v1(-16.925,-35.2) v1(-16.925,-31.4) ; v1(-11.2,-23.925) -11.2,-27 v1(-11.175,-27.025) ; v1(-9.4,-48.975) -9.4,-47.325 v1(-7.875,-45.8) ; v1(2.325,-25.45) v1(2.325,-21.65) ; v1(29.825,-32.4) 29.9,-32.325 30.8,-32.325 v1(32.3,-30.825) ; v1(32.9,-26.85) 34.475,-25.275 v1(37.225,-25.275) 37.225,-22.525 v1(37.2,-22.5)
FT_VPHY: C71.2 C72.2 C73.2 L2.2 U20.4 | length 9.6
  Top Layer w0.2: U20.4@4.75,-40.95 U20.4@4.7,-40.9 5.975,-40.9 6.725,-41.65 C72.2@7.55,-41.65 C71.2@9.35,-41.65 C73.2@11.15,-41.65 11.8,-41.65 L2.2@13.3,-40.15
FT_VPLL: C67.2 C68.2 C69.2 L1.2 U20.9 | length 8.8
  Top Layer w0.2: U20.9@4.75,-38.45 U20.9@4.7,-38.4 7.5,-38.4 C68.2@7.55,-38.45 C67.2@9.35,-38.45 C69.2@11.15,-38.45 11.3,-38.3 L1.2@13.3,-38.3
GND_STM321: C4.2 C5.2 C6.2 C8.2 C10.2 C12.2 C13.1 C14.1 C15.1 C16.1 C17.1 C18.1 C19.1 C20.1 C21.1 C22.1 C23.1 C24.1 C25.1 C26.1 C27.1 C28.1 C29.1 C30.1 C31.1 C32.1 C33.1 C34.1 C35.1 C36.1 C37.1 C38.1 C39.1 C40.1 C41.1 C42.1 C43.1 C44.1 C45.1 C46.1 C47.1 C48.1 C49.2 C52.2 C53.1 C54.1 C58.1 C59.1 C62.1 C63.1 D4.2 D5.2 D6.2 D7.2 D8.2 D9.2 D10.2 D11.2 D12.2 D13.2 D14.2 D15.2 J1.5 J2.5 J3.5 J5.5 P8.3 P9.3 P10.3 P11.3 Q1.1 Q2.1 Q3.1 Q12.1 R1.1 R2.1 R3.1 R7.1 R8.1 R9.1 R11.1 R13.1 R15.1 R16.1 R17.1 R18.1 R19.1 R24.1 R25.1 R26.1 R27.1 R38.1 R52.1 R56.1 S1.1 S2.1 S3.1 S4.1 U1.11 U2.11 U3.11 U4.4 U4.18 U5.4 U5.18 U6.4 U6.18 U7.12 U7.18 U7.28 U7.63 U8.12 U8.18 U8.28 U8.63 U9.12 U9.18 U9.28 U9.63 U10.12 U10.18 U10.28 U10.63 U11.5 U15.4 U15.18 U16.11 U17.5 U18.12 U19.5 U21.1 Y1.2 Y2.2 Y3.2 Y4.2 | length 291.9
  Top Layer w0.2: C49.2@-61.875,-19.95 -60.75,-18.825 v1(-60.725,-18.825) ; U15.4@-61.35,-32.875 -61.35,-31.069 v1@-60.491,-30.209 ; v1(-60.4,-30.3) v1@-60.491,-30.209 ; C52.2@-58.625,-22.95 -58.625,-23.724 -59.4,-24.499 U15.18@-59.4,-26.325 -59.4,-29.119 v1@-60.491,-30.209 ; Q2.1@-55.585,26.525 -55.585,25.015 -55.885,24.715 R13.1@-55.885,24.075 -55.885,21.485 v1(-55.3,20.9) ; R38.1@-55.4,-24.25 -55.4,-25.2 v1(-55.3,-25.3) ; R52.1@-50.875,-30.8 v1(-48.9,-30.8) -47.992,-30.8 -46.35,-32.442 U16.11@-46.35,-33.45 ; C33.1@-49.125,-3.075 -48.975,-3.225 -48.575,-3.225 -48.175,-3.625 -48.175,-4.325 -47.825,-4.675 C41.1@-47.375,-4.675 -46.125,-4.675 v1(-46.1,-4.7) ; C21.1@-47.275,10.375 v1(-46.025,10.375) -45.575,10.825 -45.575,11.175 ; R19.1@-45.875,12.925 -45.875,11.475 -45.575,11.175 ; C13.1@-44.625,11.056 -43.625,10.056 -42.945,9.376 U7.28@-42.945,7.525 ; C13.1@-44.625,11.175 -45.575,11.175 ; U2.11@-43.025,33.75 -39.7,33.75 -38.5,32.55 -38.5,29.55 -38.85,29.2 -38.85,24.075 -38.625,23.85 R8.1@-37.85,23.85 R8.1@-37.724,23.724 ; v1(-38.9,-29.8) -38.685,-29.8 Q12.1@-37.86,-30.625 -37.86,-32.135 -38.16,-32.435 R56.1@-38.16,-33.075 ; U7.63@-37.945,-3.675 -37.945,-4.795 -37.315,-5.425 -37.19,-5.3 -36.61,-5.3 -36.485,-5.425 -35.275,-5.425 C46.1@-35.225,-5.375 ; U7.18@-37.945,7.525 -37.945,8.986 -37.631,9.3 ; C17.1@-37.125,10.675 -37.125,9.806 -37.631,9.3 ; v1(-36.6,9.3) -37.631,9.3 ; U7.12@-35.595,3.675 -34.325,3.675 -34.075,3.925 C30.1@-33.375,3.925 ; C46.1@-35.175,-5.325 C46.1@-35.225,-5.375 ; R24.1@-34.625,-11.575 -33.35,-11.575 v1(-33.3,-11.625) ; v1(-34.3,14.7) -33.875,15.125 S1.1@-31.875,15.125 ; v1(-33.4,2.8) -33.375,2.825 C30.1@-33.375,3.925 ; C38.1@-33.375,-3.325 -33.375,-4.725 -34.025,-5.375 ; C30.1@-33.375,4.025 C30.1@-33.375,3.925 ; v1(-32.9,-6.5) -34.025,-5.375 ; Y1.2@-31.375,0.625 -30.025,0.625 v1(-29.575,0.175) ; C10.2@-31.25,23.25 -31.25,23.68 -31,23.93 -30.588,23.93 -29.975,24.544 -29.975,29.222 v1(-28.9,30.297) -28.025,31.172 U5.4@-28.025,33.175 ; C25.1@-30.875,6.175 -29.525,6.175 v1(-29.5,6.2) ; v1(-26.1,-29.6) -26.725,-30.225 C62.1@-26.725,-30.9 -26.23,-31.395 U19.5@-24.275,-31.395 ; v1(-24.2,22.8) C5.2@-24.2,24.25 ; v1@-23.625,-3.075 C34.1@-22.125,-3.075 -21.975,-3.225 -21.575,-3.225 -21.175,-3.625 -21.175,-4.325 -20.825,-4.675 C42.1@-20.375,-4.675 ; v1(-21.4,21.4) -21.36,21.36 R11.1@-21.36,24.3 -21.36,24.94 -21.06,25.24 Q1.1@-21.06,26.75 ; C22.1@-20.275,10.375 -19.325,10.375 -18.55,11.15 -18.55,11.175 ; R16.1@-19.825,13.55 -19.825,12.45 -18.55,11.175 ; U8.28@-15.945,7.525 -15.945,9.376 v1(-16.297,9.728) -16.625,10.056 -17.625,11.056 C14.1@-17.625,11.175 -18.55,11.175 ; U8.63@-10.945,-3.675 -10.895,-3.725 -10.895,-4.761 -10.231,-5.425 -8.275,-5.425 C47.1@-8.175,-5.325 ; U8.18@-10.945,7.525 -10.945,8.986 v1@-10.475,9.456 ; v1(-10.475,9.45) v1@-10.475,9.456 ; C18.1@-10.125,10.675 -10.125,9.806 v1@-10.475,9.456 ; U8.12@-8.595,3.675 -7.325,3.675 -7.075,3.925 C31.1@-6.375,3.925 ; R25.1@-7.625,-11.575 -7.625,-13.375 v1(-7.6,-13.4) ; U3.11@-7.275,33.675 -3.95,33.675 -2.75,32.475 -2.75,29.475 -3.1,29.125 -3.1,24 -2.875,23.775 R9.1@-2.1,23.775 R9.1@-1.974,23.649 ; C39.1@-6.375,-3.325 -5.45,-3.325 -4.975,-2.85 v1(-4.975,-2.2) ; C31.1@-6.375,4.025 -6.35,4 v1(-6.35,3.075) ; v1(-6.25,0.5) -6.125,0.625 Y2.2@-4.375,0.625 ; v1(-5.5,12.1) -5.5,14 -5.925,14.425 -5.925,14.05 S3.1@-5.5,14.475 ; v1(-4.95,5.6) -4.95,5.725 -4.5,6.175 C26.1@-3.875,6.175 ; v1@3.375,-3.075 C35.1@4.875,-3.075 5.025,-3.225 5.425,-3.225 5.825,-3.625 5.825,-4.325 6.175,-4.675 C43.1@6.625,-4.675 ; C12.2@4.5,23.175 5.775,24.45 U6.18@5.775,26.55 5.825,26.6 5.825,30.151 7.575,31.901 7.575,32.95 U6.4@7.725,33.1 ; C23.1@6.725,10.375 7.675,10.375 8.45,11.15 8.45,11.175 ; R17.1@7.175,13.55 7.175,12.45 8.45,11.175 ; U11.5@9.675,-25.455 11.63,-25.455 C54.1@12.125,-25.95 v1(12.125,-27.125) ; U9.28@11.055,7.525 11.055,9.376 v1(10.703,9.728) 10.375,10.056 9.375,11.056 C15.1@9.375,11.175 8.45,11.175 ; v1(11.5,22.9) C6.2@11.5,24.25 ; v1(15.1,20.8) 14.89,21.01 R15.1@14.89,24.05 14.89,24.69 15.19,24.99 Q3.1@15.19,26.5 ; U9.63@16.055,-3.675 16.105,-3.725 16.105,-4.761 16.769,-5.425 18.725,-5.425 C45.1@18.825,-5.325 ; U9.18@16.055,7.525 16.055,8.986 v1@16.525,9.456 ; v1(16.525,9.45) v1@16.525,9.456 ; C19.1@16.875,10.675 16.875,9.806 v1@16.525,9.456 ; U9.12@18.405,3.675 19.675,3.675 19.925,3.925 C29.1@20.625,3.925 ; v1(19.05,14.05) 21.075,14.05 S2.1@21.5,14.475 ; R26.1@19.375,-11.575 19.375,-12.475 v1(19.7,-12.8) ; C37.1@20.625,-3.325 21.55,-3.325 22.025,-2.85 v1(22.025,-2.2) ; C29.1@20.625,4.025 20.65,4 v1(20.65,3.075) ; v1(20.75,0.5) 20.875,0.625 Y3.2@22.625,0.625 ; v1(22.05,5.6) 22.05,5.725 22.5,6.175 C27.1@23.125,6.175 ; U1.11@27.929,33.8 31.254,33.8 32.454,32.6 32.454,29.6 32.104,29.25 v1@32.104,28.3 ; v1@30.375,-3.075 C36.1@31.875,-3.075 32.025,-3.225 32.425,-3.225 32.825,-3.625 32.825,-4.325 33.175,-4.675 C44.1@33.625,-4.675 ; v1(32.1,28.3) v1@32.104,28.3 ; R7.1@33.23,23.774 R7.1@33.104,23.9 32.329,23.9 32.104,24.125 v1@32.104,28.3 ; C24.1@33.725,10.375 34.675,10.375 35.45,11.15 35.45,11.175 ; R18.1@34.175,13.55 34.175,12.45 35.45,11.175 ; U10.28@38.055,7.525 38.055,9.376 v1(37.703,9.728) 37.375,10.056 36.375,11.056 C16.1@36.375,11.175 35.45,11.175 ; C8.2@39.704,23.3 40.979,24.575 U4.18@40.979,26.675 40.979,29.279 42.929,31.229 U4.4@42.929,33.225 ; U10.63@43.055,-3.675 43.105,-3.725 43.105,-4.761 43.769,-5.425 45.725,-5.425 C48.1@45.825,-5.325 ; U10.18@43.055,7.525 43.055,8.986 v1@43.525,9.456 ; v1(43.525,9.45) v1@43.525,9.456 ; C20.1@43.875,10.675 43.875,9.806 v1@43.525,9.456 ; U10.12@45.405,3.675 46.675,3.675 46.925,3.925 C32.1@47.625,3.925 ; U18.12@45.575,-33.985 48.035,-33.985 C63.1@48.2,-34.15 48.2,-35.6 v1(48.3,-35.7) ; v1(46.3,14) 46.1,14 46.05,14.05 48.075,14.05 S4.1@48.5,14.475 ; v1@46.375,-12.725 R27.1@46.375,-11.575 ; v1(46.7,23.2) 46.8,23.2 47,23.4 C4.2@47,24.55 ; C40.1@47.625,-3.325 48.55,-3.325 49.025,-2.85 v1(49.025,-2.2) ; C32.1@47.625,4.025 47.65,4 v1(47.65,3.075) ; v1(47.75,0.5) 47.875,0.625 Y4.2@49.625,0.625 ; v1(49.05,5.6) 49.05,5.725 49.5,6.175 C28.1@50.125,6.175 ; v1(52.3,-31.5) C58.1@52.3,-30.15 ; C59.1@55.75,-30.25 U21.1@55.75,-32.8 55.75,-34.05 v1(56.6,-34.9) ; C53.1@64.495,-27.05 64,-27.545 U17.5@64,-29.5 65,-29.5 v1(65.1,-29.4) ; C46.1@-35.225,-5.375 -34.025,-5.375
  Bottom Layer w0.2: v1@-55.4,-25.3 v1(-55.3,-25.3)
  other v1: 46.375,-12.775 -9.65,-5.375 17.35,-5.375 44.35,-5.375 -23.425,-3.075 3.575,-3.075 30.575,-3.075 -19.3,10.35 7.7,10.35 34.7,10.35 -3.1,28.1 -38.85,28.3 42,30.3 6.574,30.9
HDPLX_External_iface1: U7.11 U15.14 | length 56.4
  Top Layer w0.2: U15.14@-56.8,-26.325 -56.8,-22.699 -58.1,-21.399 -58.1,-18.924 -59.4,-17.624 -59.4,-6.682 -54.6,-1.882 -54.6,4.566 -52.866,6.3 -52.3,6.3 v1(-52,6.6) ; v1(-38.375,3.675) -38.375,3.425 -38.075,3.125 -37.078,3.125 -37.028,3.175 U7.11@-35.595,3.175
  Bottom Layer w0.2: v1(-52,6.6) -52,6.4 -51,5.4 -51,4.7 -49.4,3.1 -40.1,3.1 -39.525,3.675 v1(-38.375,3.675)
HDPLX_External_iface2: U5.14 U8.11 | length 39.3
  Top Layer w0.2: U5.14@-32.575,26.625 -32.575,23.35 -31.775,22.55 -28.113,22.55 -22.089,16.526 -21.811,16.526 -21.286,16.001 v1(-21.076,16.001) ; v1(-11.375,3.675) -11.375,3.425 -11.075,3.125 -10.078,3.125 -10.028,3.175 U8.11@-8.595,3.175
  Bottom Layer w0.2: v1@-21.101,15.951 -21.101,15.825 -20.926,15.65 -17.978,15.65 -17.275,14.947 -17.275,9.151 -11.799,3.675 v1(-11.375,3.675)
HDPLX_External_iface3: U6.14 U9.11 | length 33.5
  Top Layer w0.2: U6.14@3.175,26.55 3.175,23.275 3.975,22.475 4.5,22.475 4.75,22.225 4.75,21.485 4.75,17.175 v1(5.924,16.001) ; v1(15.625,3.675) 15.625,3.425 15.925,3.125 16.922,3.125 16.972,3.175 U9.11@18.405,3.175
  Bottom Layer w0.2: v1@5.899,15.951 5.899,15.825 6.074,15.65 9.022,15.65 9.725,14.947 9.725,9.151 15.201,3.675 v1(15.625,3.675)
HDPLX_External_iface4: U4.14 U10.11 | length 32.2
  Top Layer w0.2: U4.14@38.379,26.675 38.379,23.4 39.179,22.6 40.175,22.6 42.975,19.8 42.975,17.425 44.2,16.2 44.2,15.35 43.875,15.025 43.875,14.978 v1(43.902,14.951) ; v1(42.625,3.675) 42.625,3.425 42.925,3.125 43.922,3.125 43.972,3.175 U10.11@45.405,3.175
  Bottom Layer w0.2: v1(42.625,3.675) 42.201,3.675 40.075,5.801 40.075,9.25 43.4,12.575 43.4,14.449 v1(43.902,14.951)